# EAGLE board Design_1 (EAGLE 9.6.2)
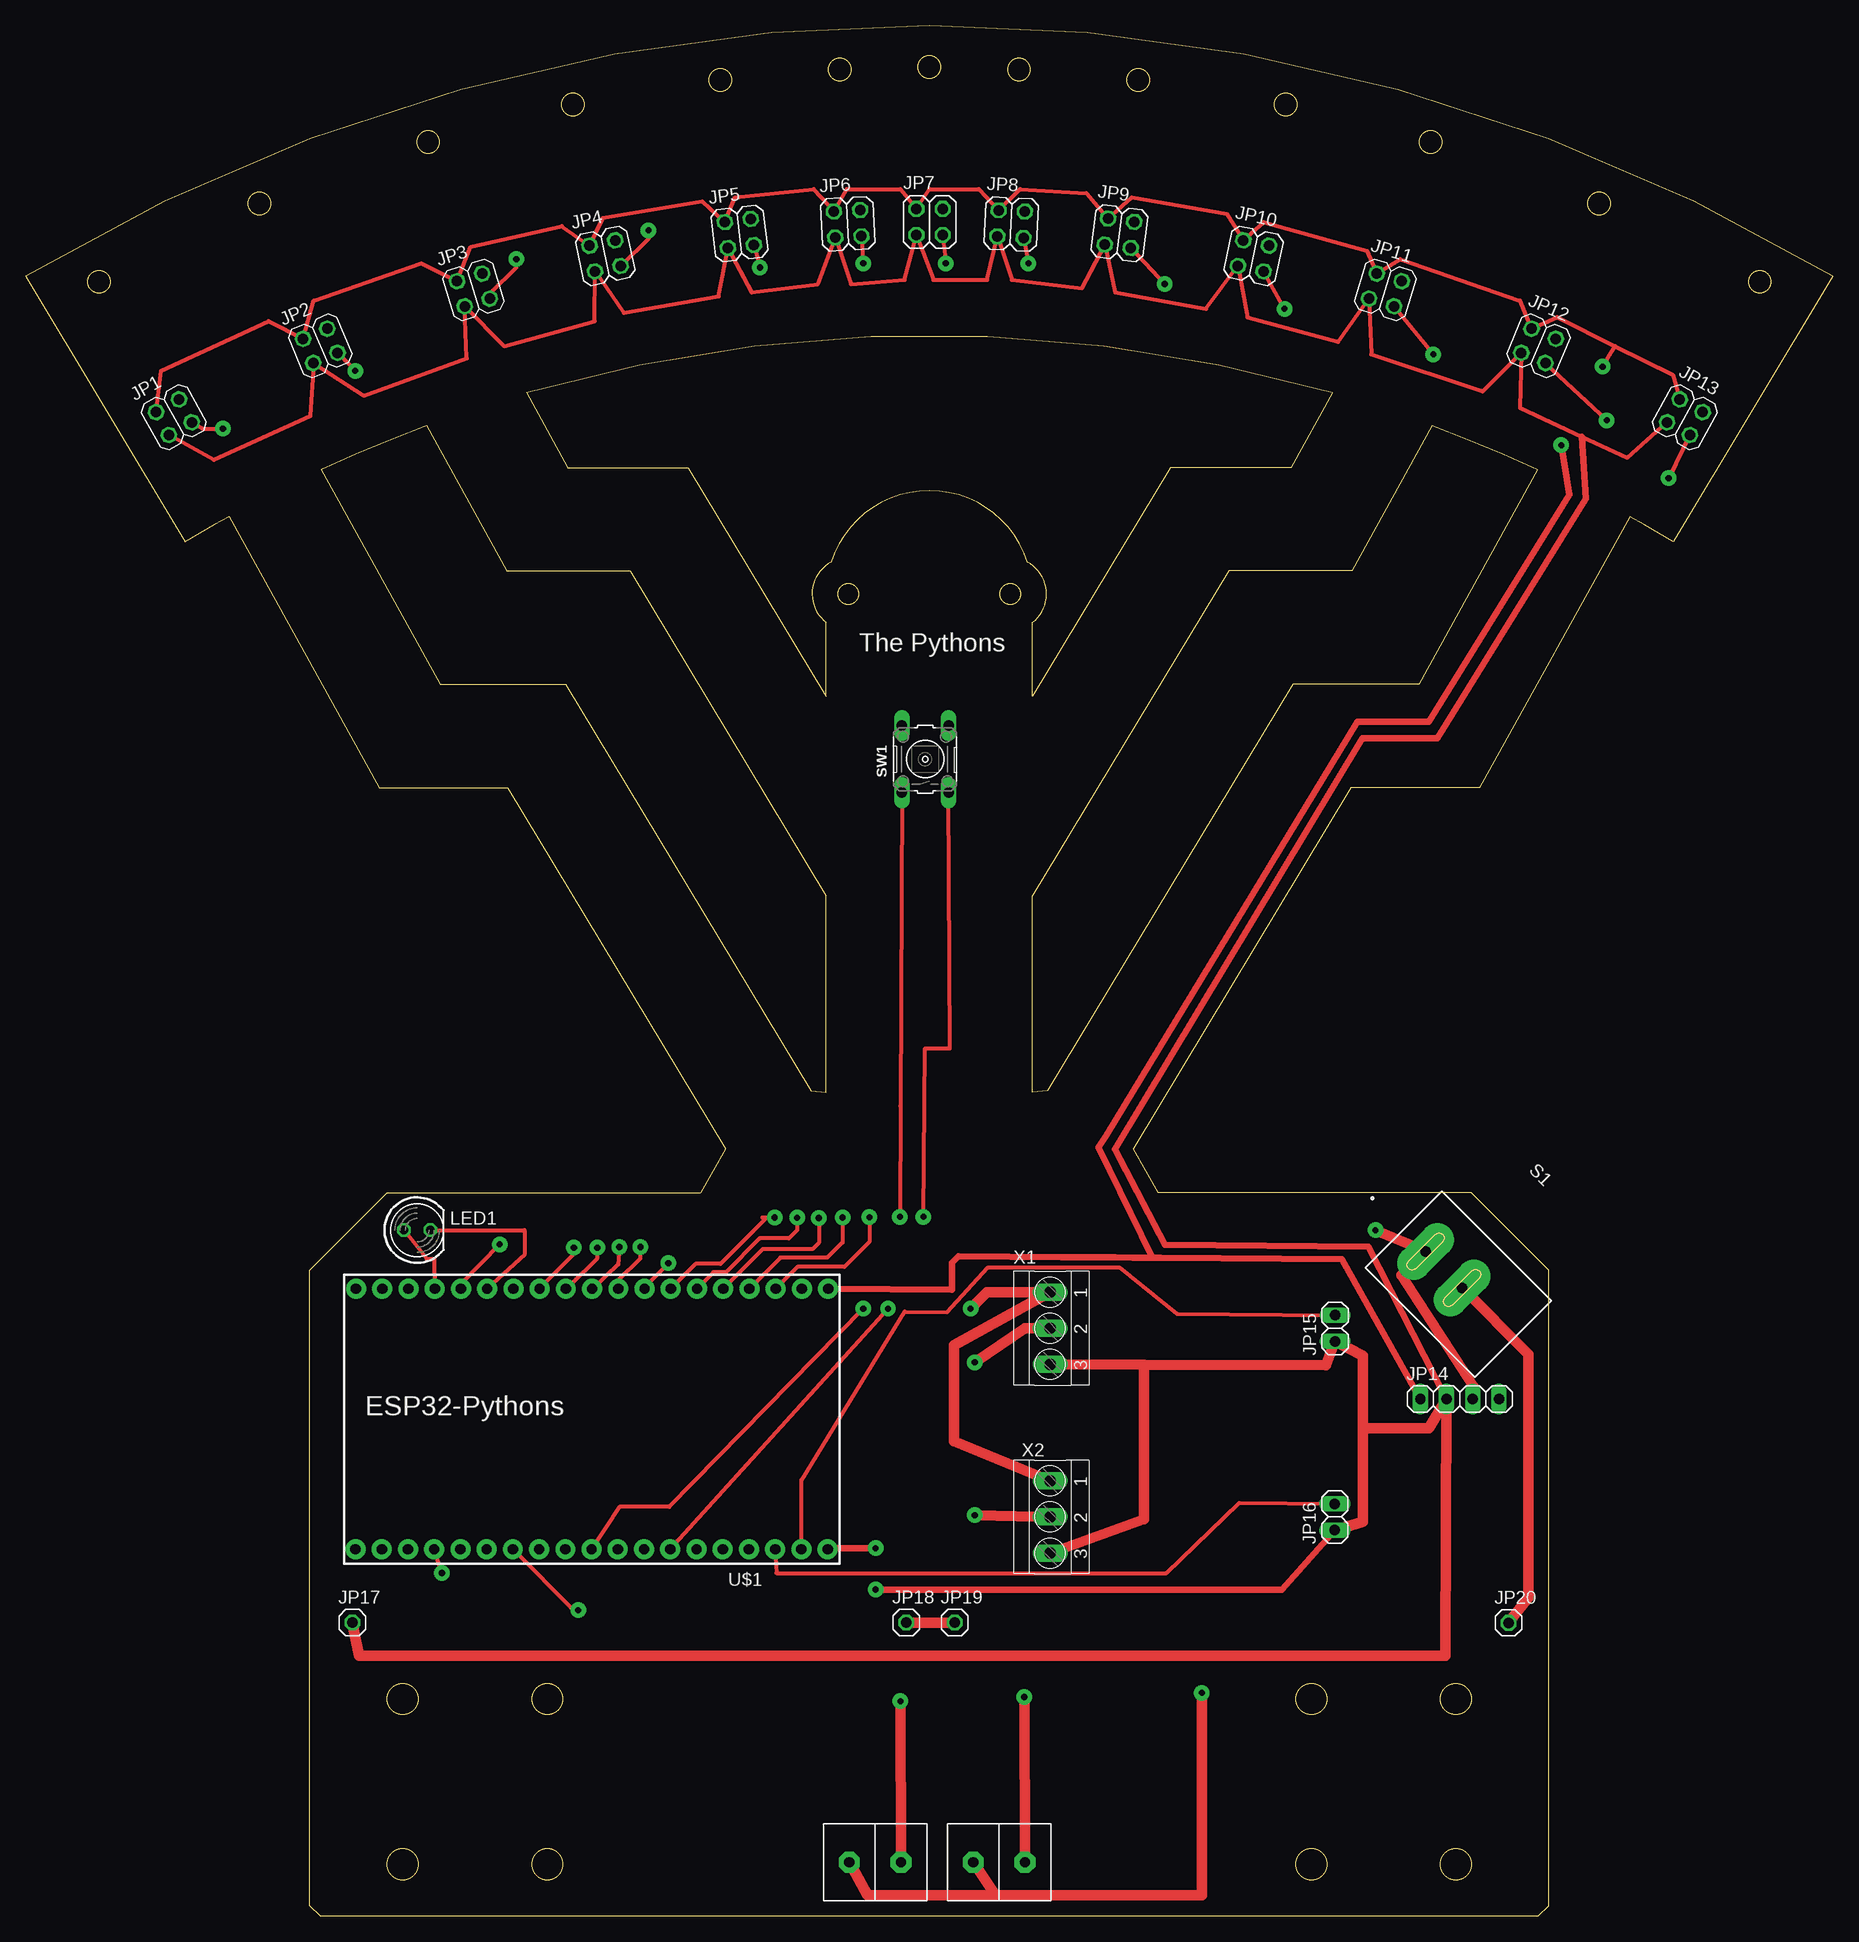
[diagram p0: board, top side]
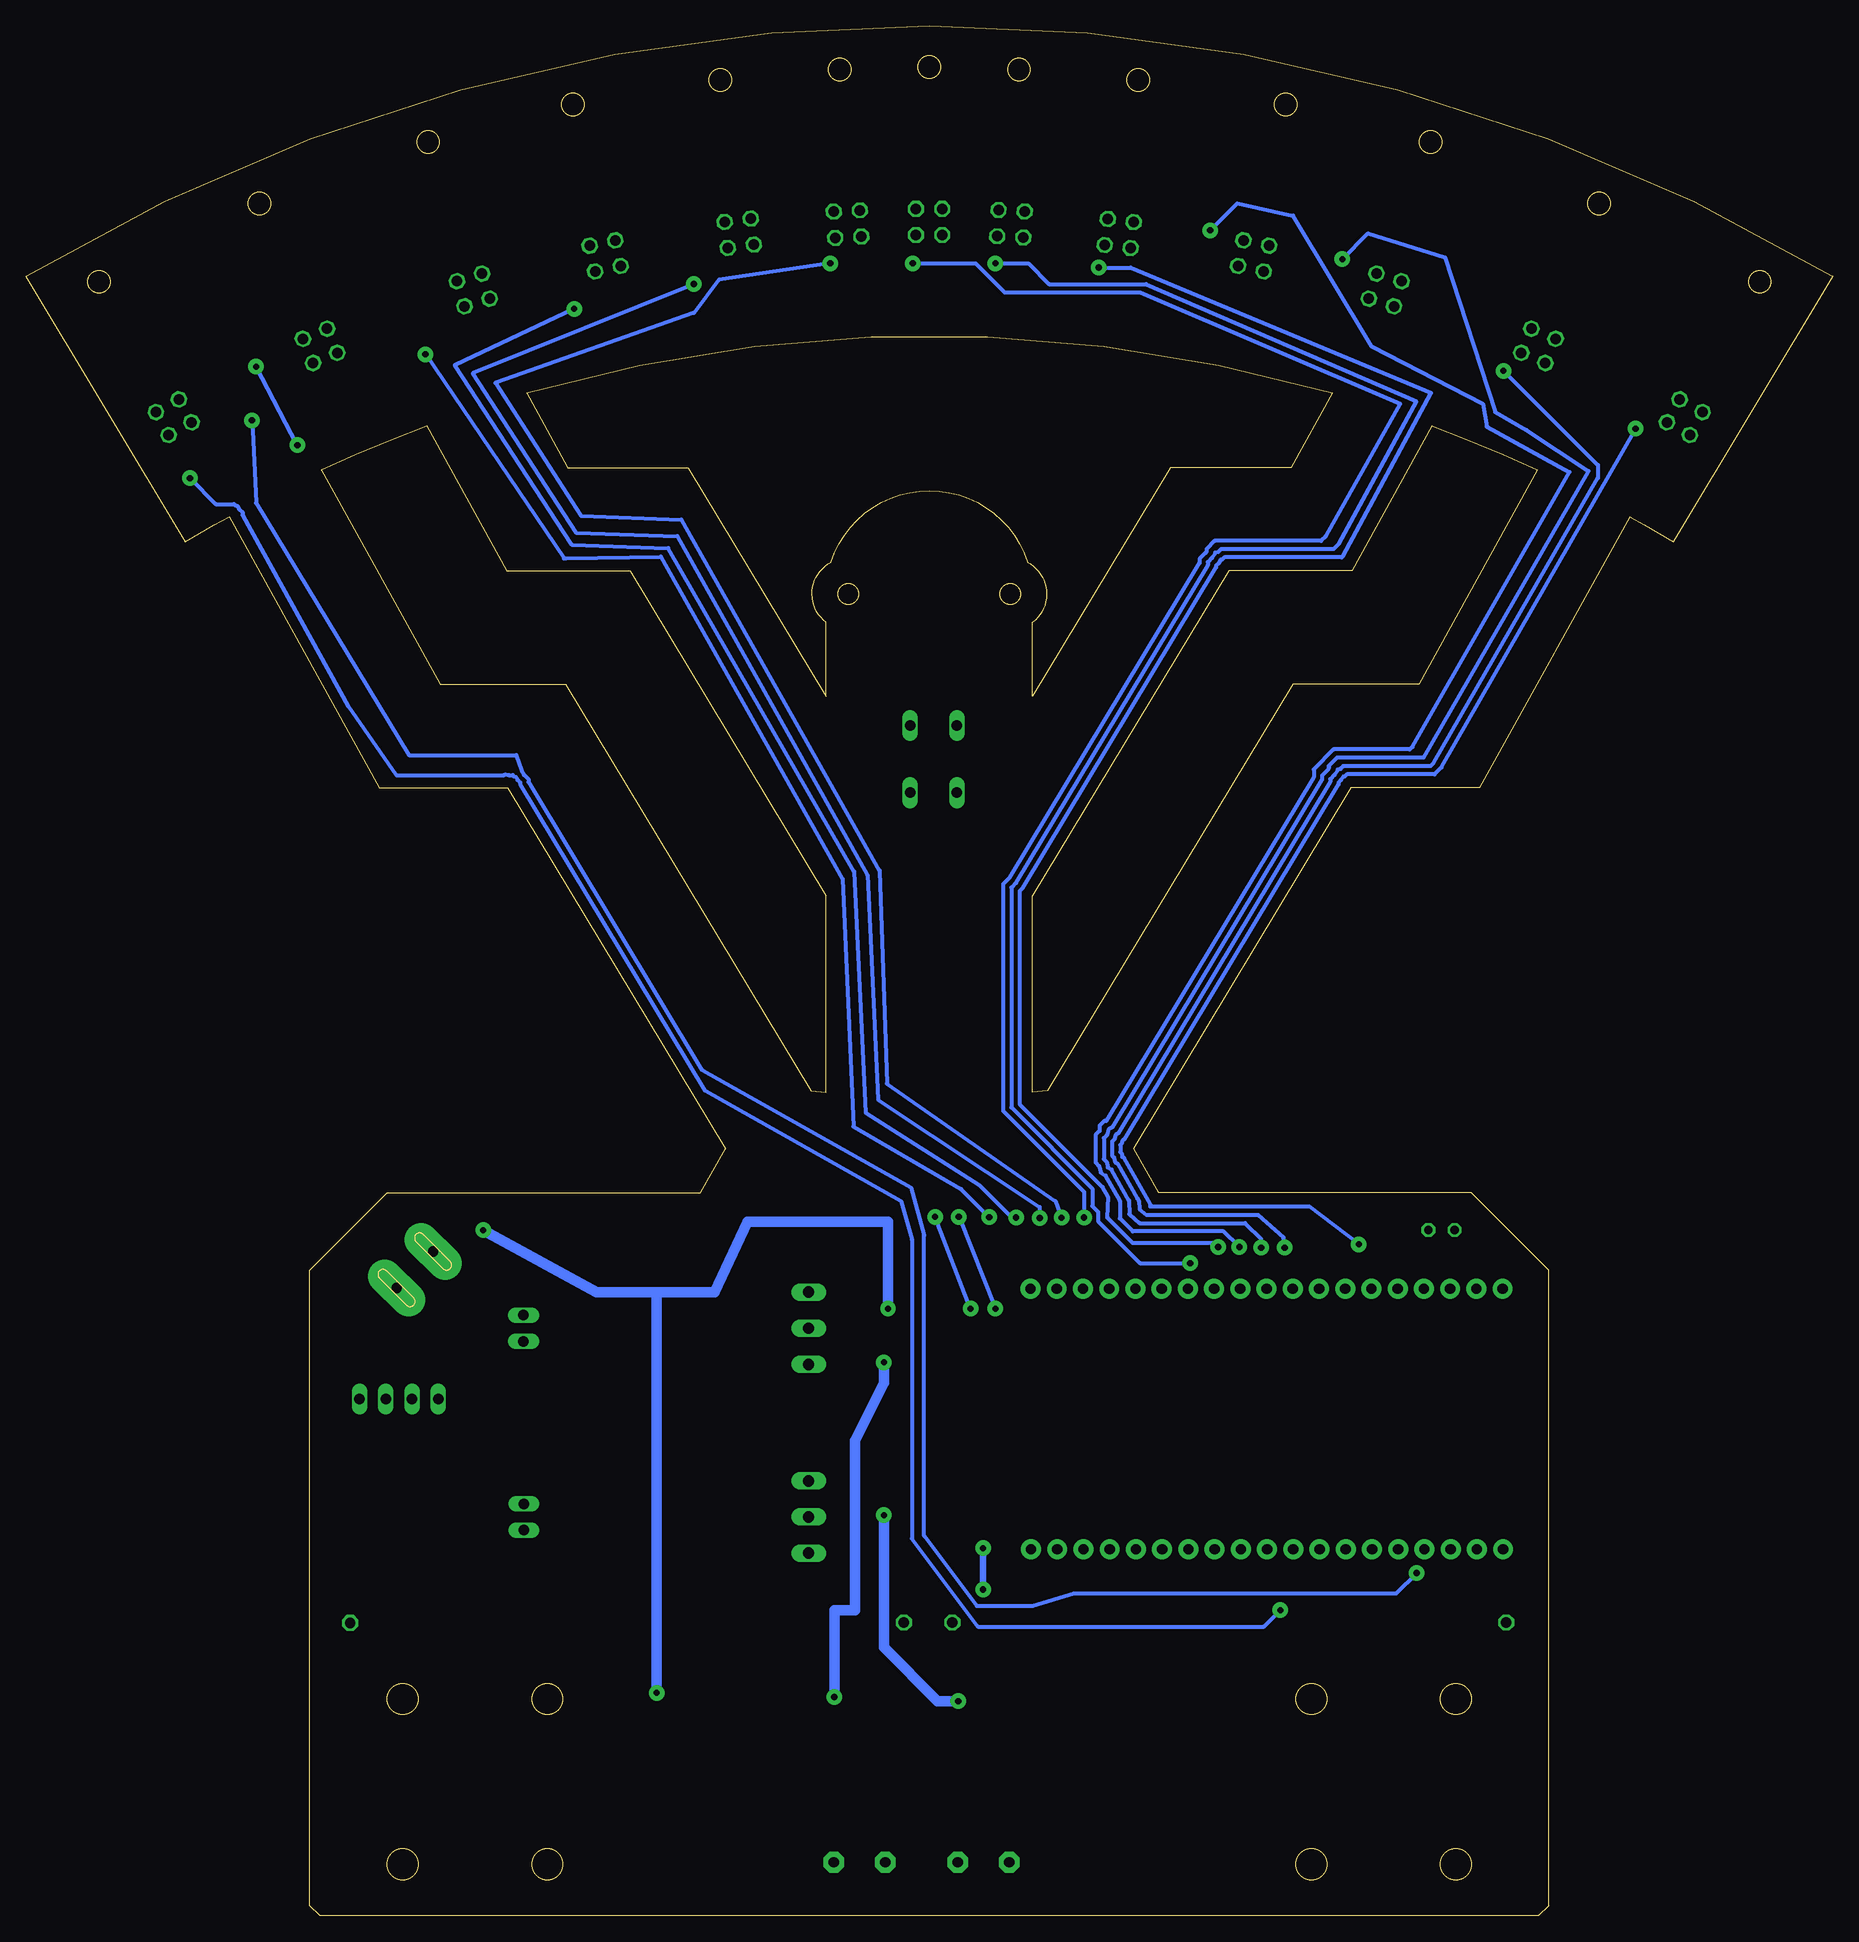
[diagram p1: board, bottom side, seen from below]

Size 175 x 183 mm. Coordinates in mm from the lower left corner, seen from the top.
Outline: 15.44,133.03 0,158.75 arc-62 175,158.75 159.56,133.03 arc2 155.33,135.47
Outline: 15.44,133.03 15.44,133.03
Outline: 15.44,133.03 arc-2 19.67,135.47 34.21,109.23 46.65,109.23 67.75,74.28 65.33,70 35,70 27.5,62.5 27.5,1 28.5,0 146.5,0 147.5,1 147.5,62.5 140,70 109.67,70 107.25,74.28 128.35,109.23 140.79,109.23 155.33,135.47
Outline: 155.33,135.47 155.33,135.47
Outline: 146.41,140 arc5 136.19,144.26 128.42,130.23 116.49,130.23 97.5,98.76 97.5,79.76 98.96,79.89 122.7,119.23 134.9,119.23 146.41,140
Outline: 28.59,140 40.1,119.23 52.3,119.23 76.04,79.89 77.5,79.76 77.5,98.76 58.51,130.23 46.58,130.23 38.81,144.26 arc5 28.59,140
Outline: 97.5,118.11 97.5,125.24 arc114 97.01,131.08 arc144 77.99,131.08 arc114 77.5,125.24 77.5,118.11 64.15,140.23 52.48,140.23 48.48,147.45 arc-32 126.52,147.45 122.52,140.23 110.85,140.23 97.5,118.11
Outline: circle at 79.65,128 radius 1
Outline: circle at 7.08,158.22 radius 1.09
Outline: circle at 22.64,165.8 radius 1.09
Outline: circle at 38.97,171.75 radius 1.09
Outline: circle at 52.99,175.37 radius 1.09
Outline: circle at 67.27,177.76 radius 1.09
Outline: circle at 78.81,178.77 radius 1.09
Outline: circle at 87.5,179 radius 1.09
Outline: circle at 96.19,178.77 radius 1.09
Outline: circle at 107.73,177.76 radius 1.09
Outline: circle at 122.01,175.37 radius 1.09
Outline: circle at 136.03,171.75 radius 1.09
Outline: circle at 152.36,165.8 radius 1.09
Outline: circle at 167.92,158.22 radius 1.09
Outline: circle at 95.35,128 radius 1
Outline: circle at 36.5,21 radius 1.5
Outline: circle at 50.5,5 radius 1.5
Outline: circle at 124.5,21 radius 1.5
Outline: circle at 124.5,5 radius 1.5
Outline: circle at 138.5,5 radius 1.5
Copper layers (1*16): Top 0.035mm / dielectric 1.5mm / Bottom 0.035mm
Design rules "default *": minimum track width 0.4mm, minimum drill 0.35mm, track to track 0.4mm, track to pad 0.4mm, pad to pad 0.4mm, via to via 0.4mm, smd to smd 6mil, copper to edge 40mil, drill to drill 6mil, minimum pad ring 10mil, minimum via ring 8mil, stop-mask expansion 4mil, vias tented up to drill 0mil, thermal gap 10mil

## Footprints (pad centres in the part's own frame; a part is rotated, then mirrored left to right if it is on the bottom)
2X02 = drill 1.016 octagon: 1 -1.27,-1.27; 2 -1.27,1.27; 3 1.27,-1.27; 4 1.27,1.27
1X04 = drill 1.016 long: 1 -3.81,0; 2 -1.27,0; 3 1.27,0; 4 3.81,0
1X02 = drill 1.016 long: 1 -1.27,0; 2 1.27,0
1X01 = drill 1.016 octagon: 1 0,0
LED5MM = drill 0.813 octagon: A -1.27,0; K 1.27,0
E-SWITCH_RR511D1121 = drill 0.98 pad 3.26 long: 1 -5,0; 2 0,0
B3F-10XX = drill 1.016 long: 1 -3.251,2.261; 2 3.251,2.261; 3 -3.251,-2.261; 4 3.251,-2.261
ESP32-DEVKITV1 = drill 1 pad 1.93: 2 11.47,12.962; 3V3 -24.14,-12.27; 4 6.39,12.962; 5 -1.23,12.962; 5V 21.58,-12.27; 12 6.34,-12.27; 13 11.42,-12.27; 14 3.8,-12.27; 15 14.01,12.962; 16 3.85,12.962; 17 1.31,12.962; 18 -3.77,12.962; 19 -6.31,12.962; 21 -11.39,12.962; 22 -19.01,12.962; 23 -21.55,12.962; 25 -3.82,-12.27; 26 -1.28,-12.27; 27 1.26,-12.27; 32 -8.9,-12.27; 33 -6.36,-12.27; 34 -13.98,-12.27; 35 -11.44,-12.27; C 8.93,12.962; CLK 21.63,12.962; D0 19.09,12.962; D1 16.55,12.962; D2 13.96,-12.27; D3 16.5,-12.27; EN -21.6,-12.27; GND1 8.88,-12.27; GND2 19.04,-12.27; GND3 -24.09,12.962; GND4 -8.85,12.962; RX -13.93,12.962; TX\ -16.47,12.962; VN -16.52,-12.27; VP -19.06,-12.27
DBCONN-1X2 = drill 1 pad 2 octagon: P0 -2.54,0; P1 2.46,0
TERMINAL-BLOCK-3-PIN-3.5MM-LONG-PAD = drill 1.1 pad 1.7 long: 1 -3.5,-0.1; 2 0,-0.1; 3 3.5,-0.1

## Placement (x,y rotation side)
JP1  [2X02]  14.34,145.11 29 top
JP2  [2X02]  28.52,152.02 23 top
JP3  [2X02]  43.35,157.43 17 top
JP4  [2X02]  56.1,160.73 12 top
JP5  [2X02]  69.11,162.89 7 top
JP6  [2X02]  79.6,163.83 3 top
JP7  [2X02]  87.52,164.01 0 top
JP8  [2X02]  95.42,163.8 357 top
JP9  [2X02]  105.91,162.92 353 top
JP10  [2X02]  118.89,160.73 348 top
JP11  [2X02]  131.67,157.43 343 top
JP12  [2X02]  146.5,152.02 337 top
JP13  [2X02]  160.67,145.11 331 top
JP14  [1X04]  138.87,50.04 0 top
JP15  [1X02]  126.79,56.9 90 top
JP16  [1X02]  126.77,38.63 90 top
JP17  [1X01]  31.63,28.4 0 top
JP18  [1X01]  85.27,28.41 0 top
JP19  [1X01]  89.96,28.41 0 top
JP20  [1X01]  143.59,28.38 0 top
LED1  [LED5MM]  37.9,66.4 0 top
S1  RR511D1121  [E-SWITCH_RR511D1121]  139.1,60.8 315 top
SW1  [B3F-10XX]  87.1,112 90 top
U$1  ESP32DEVKITV1  [ESP32-DEVKITV1]  53.56,48.46 180 top
U$2  DBCONN-1X2  [DBCONN-1X2]  94.3,5.2 0 top
U$3  DBCONN-1X2  [DBCONN-1X2]  82.3,5.2 0 top
X1  TERMINAL-BLOCK-3.5MM-3-PIN-LONG-PAD  [TERMINAL-BLOCK-3-PIN-3.5MM-LONG-PAD]  99.29,56.9 270 top
X2  TERMINAL-BLOCK-3.5MM-3-PIN-LONG-PAD  [TERMINAL-BLOCK-3-PIN-3.5MM-LONG-PAD]  99.29,38.63 270 top

## Library data of the parts
JP1-JP20 = pinhead
LED1 = led
S1 = RR511D1121; AVAILABILITY: In Stock; CHECK_PRICES: https://www.snapeda.com/parts/RR511D1121/E-Switch/view-part/?ref=eda; DESCRIPTION: Rocker Switch, RR5 Series, SPST,OFF-ON,Blk Rocker,I/O Legend, 20A, 125VAC, | E-Switch RR511D1121; MF: E-Switch; MP: RR511D1121; PACKAGE: None; PRICE: None; PURCHASE-URL: https://www.snapeda.com/api/url_track_click_mouser/?unipart_id=351624&manufacturer=E-Switch&part_name=RR511D1121&search_term=None; SNAPEDA_LINK: https://www.snapeda.com/parts/RR511D1121/E-Switch/view-part/?ref=snap
SW1 = buttons
U$1 = ESP32-DEVKITV1
U$2 U$3 = Terminal Block Connector
X1 X2 = Rembrandt Electronics - Terminal Block 3-5mm v1-0

## Nets
B_+3V3: JP1.2 JP2.2 JP3.2 JP4.2 JP5.2 JP6.2 JP7.2 JP8.2 JP9.2 JP10.2 JP11.2 JP12.2 JP13.2 JP14.1 U$1.3V3
B_GND: JP1.1 JP2.1 JP3.1 JP4.1 JP5.1 JP6.1 JP7.1 JP8.1 JP9.1 JP10.1 JP11.1 JP12.1 JP13.1 JP14.2 JP15.1 JP16.1 JP17.1 U$1.GND3 X1.3 X2.3
BATT+: JP20.1 S1.2
BATT_SERIES: JP18.1 JP19.1
BTN_GND: SW1.3 U$1.GND4
BTN_PIN: SW1.1 U$1.5
LED+: LED1.A U$1.D2
LED-: LED1.K U$1.GND1
MOT1-: U$2.P1 X1.2
MOT2-: U$3.P1 X2.2
PWM1: JP15.2 U$1.23
PWM2: JP16.2 U$1.22
S1: JP1.3 U$1.13
S2: JP2.3 U$1.14
S3: JP3.3 U$1.27
S4: JP4.3 U$1.26
S5: JP5.3 U$1.25
S6: JP6.3 U$1.33
S7: JP7.3 U$1.32
S8: JP8.3 U$1.35
S9: JP9.3 U$1.34
S10: JP10.3 U$1.VN
S11: JP11.3 U$1.VP
S12: JP12.3 U$1.15
S13: JP13.3 U$1.4
SWITCH+: JP14.3 S1.1 U$2.P0 U$3.P0 X1.1 X2.1

## Tracks (layer width: path | path; a pad name or v marks a point on that pad's centre or on a via)
B_+3V3  (via drill 0.6 pad 1.5)
  Top 0.4: JP1.2 13.1,149.6 23.5,154.4 JP2.2 27.9,156.4 38.3,160 JP3.2 43.1,161.6 51.9,163.6 JP4.2 55.9,164.4 65.5,166 JP5.2 68.7,166.4 76.3,167.2 JP6.2 79.5,167.2 84.7,167.2 JP7.2 87.5,167.2 92.3,167.2 JP8.2 96.3,167.2 102.7,166.8 JP9.2 107.1,166.4 116.3,164.8 JP10.2 119.9,164 129.9,161.2 JP11.2 133.1,160.4 144.7,156.4 JP12.2 148.3,154.8 153.9,152 | 153.9,152 159.5,149.2 JP13.2 | 107.28,63.75 107.22,63.75 | v152.7,150 153.9,152
  Top 0.61: U$1.3V3 89.72,60.64 89.72,63.26 90.33,63.87 100.3,63.8 100.7,63.8 102.29,63.78 105.5,63.76 107.22,63.75 | 109.5,63.73 109.9,63.73 127.47,63.6 JP14.1 | 109.5,63.73 109.1,63.73 | 109.5,63.73 109.1,63.73 | 109.1,63.73 107.91,63.74 107.28,63.75 | v148.7,142.4 149.5,137.6 135.9,115.6 128.96,115.6 104.65,75.57 103.9,74.4 109.1,63.73
  Bottom 0.4: v148.7,142.4 v152.7,150
B_GND  (via drill 0.6 pad 1.5)
  Top 0.4: 27.92,150.3 27.58,145.24 18.21,140.98 JP1.1 | 27.92,150.3 32.7,147.2 42.7,150.8 JP3.1 46.3,152 55.1,154.4 JP4.1 57.9,155.2 67.1,156.8 JP5.1 70.3,157.2 76.7,158 JP6.1 79.9,158 85.1,158.4 JP7.1 87.9,158.4 93.1,158.4 JP8.1 95.5,158.4 102.3,157.6 JP9.1 105.5,157.2 114.3,155.6 JP10.1 118.3,154.8 127.1,152.4 JP11.1 130.3,151.2 141.1,147.6 JP12.1 144.7,146 150.71,143.22 155.1,141.2 JP13.1 | U$1.GND3 77.76,35.6 | JP2.1 27.92,150.3
  Top 0.61: v82.3,35.6 77.76,35.6 | v82.3,31.6 121.64,31.6 JP16.1 | JP14.2 130.03,64.77 110.3,65.01 105.49,74.22 129.42,114 136.7,114 151.1,137.2 150.71,143.22
  Top 1.016: 129.48,47.2 129.51,54.22 JP15.1 125.92,53.34 108.3,53.38 | JP16.1 129.5,38.16 129.48,44.36 129.47,44.37 129.48,47.2 | 129.48,47.2 135.9,47.2 JP14.2 137.5,25.2 32.3,25.2 JP17.1 | X1.3 108.3,53.38 | 108.3,53.38 108.3,38.4 X2.3
  Bottom 0.61: v82.3,35.6 v82.3,31.6
BATT+
  Top 1.016: S1.2 145.5,54.4 145.5,30.8 JP20.1
BATT_SERIES
  Top 1.016: JP18.1 JP19.1
BTN_GND  (via drill 0.6 pad 1.5)
  Top 0.4: U$1.GND4 v83.5,58.8 | SW1.3 89.49,84 87.1,84 v86.94,67.69
  Bottom 0.4: v83.5,58.8 v86.94,67.69
BTN_PIN  (via drill 0.6 pad 1.5)
  Top 0.4: SW1.1 84.7,78.4 v84.65,67.69 | v81.1,58.8 62.3,39.6 57.5,39.6 U$1.5
  Bottom 0.4: v84.65,67.69 v81.1,58.8
LED+
  Top 0.4: LED1.A 38.84,63.62 | 38.84,63.62 | 38.84,63.62 39.56,63.63 U$1.D2
LED-
  Top 0.4: LED1.K 48.3,66.4 48.3,64 U$1.GND1
MOT1-  (via drill 0.6 pad 1.5)
  Top 1.016: U$2.P1 v96.7,21.2 | X1.2 96.78,56.9 v91.9,53.6
  Bottom 1.016: v96.7,21.2 96.7,29.6 94.7,29.6 94.7,46 91.9,51.6 v91.9,53.6
MOT2-  (via drill 0.6 pad 1.5)
  Top 1.016: U$3.P1 v84.7,20.8 | v91.9,38.8 97.99,38.63 X2.2
  Bottom 1.016: v84.7,20.8 86.7,20.8 91.9,26 v91.9,38.8
PWM1
  Top 0.4: U$1.23 75.11,42.19 85.1,58.51 89.22,58.47 93.2,62.8 105.9,62.8 111.5,58.29 JP15.2
PWM2
  Top 0.4: U$1.22 72.68,33.2 110.46,33.2 117.52,39.99 JP16.2
S1  (via drill 0.6 pad 1.5)
  Top 0.4: v19.1,144 17.13,144 JP1.3 | v45.9,65.03 42.14,61.2 U$1.13
  Bottom 0.4: v19.1,144 37.9,111.2 38.56,110.54 47.07,110.54 47.28,110.33 47.44,110.29 47.62,109.99 47.87,109.73 47.87,109.57 68.62,75.19 68.79,75.09 68.88,74.77 69.01,74.64 69.01,73.94 68.89,73.83 68.81,73.5 68.65,73.4 66.1,68.88 66.09,68.71 65.83,68.71 50.73,68.71 v45.9,65.03
S2  (via drill 0.6 pad 1.5)
  Top 0.4: v31.9,149.6 31.91,149.61 30.91,150.61 JP2.3 | v53.08,64.7 53.09,64.11 49.76,60.75 U$1.14
  Bottom 0.4: v31.9,149.6 22.75,140.46 22.75,139.23 38.7,111.6 38.96,111.34 47.41,111.34 47.69,111.06 47.95,110.99 48.26,110.48 48.67,110.07 48.67,109.79 69.2,75.78 69.47,75.63 69.59,75.19 69.81,74.97 69.81,73.61 69.61,73.42 69.51,72.98 69.24,72.83 67.35,69.47 67.22,69.24 67.14,68.43 66.46,67.89 55.67,67.89 53.21,65.71 v53.08,64.7
S3  (via drill 0.6 pad 1.5)
  Top 0.4: v47.5,160.4 47.5,159.6 44.94,157.03 JP3.3 | v55.35,64.7 55.32,63.62 52.7,61.08 52.65,61.08 U$1.27
  Bottom 0.4: v47.5,160.4 45,162.9 37.56,160.57 32.7,145.6 29.68,143.86 23.66,139.9 39.64,112.14 48.02,112.14 48.81,111.34 48.81,111.12 48.89,110.98 49.47,110.4 49.47,110.01 69.78,76.37 70.15,76.16 70.31,75.6 70.61,75.3 70.61,73.28 70.34,73.01 70.2,72.47 69.84,72.25 68.15,69.26 68.14,67.94 67.15,67.09 56.93,67.09 55.35,65.52 v55.35,64.7
S4  (via drill 0.6 pad 1.5)
  Top 0.4: v60.3,163.2 60.3,162.4 57.65,159.75 JP4.3 | U$1.26 54.87,60.73 57.38,63.08 v57.48,64.78
  Bottom 0.4: v60.3,163.2 57.68,165.82 52.27,164.62 44.7,152 33.9,146.4 33.51,144.2 25.51,139.78 40.7,113.2 40.96,112.94 48.35,112.94 50.27,111.01 50.27,110.24 70.35,76.97 70.56,76.97 71.01,76.52 71.01,76.06 71.02,76.02 71.41,75.63 71.41,72.95 71.06,72.6 70.9,71.96 70.43,71.67 69.05,69.23 69.05,67.55 67.79,66.29 59,66.29 v57.48,64.78
S5  (via drill 0.6 pad 1.5)
  Top 0.4: JP5.3 v71.1,159.6 | U$1.25 57.38,61.53 59.53,63.67 v59.53,64.77
  Bottom 0.4: v71.1,159.6 67.98,159.6 38.93,147.46 47.5,131.6 47.56,131.54 58.93,131.54 59.13,131.33 59.29,131.29 59.48,130.99 59.73,130.74 59.73,130.57 78.47,99.52 78.76,99.22 78.76,78.61 70.73,70.57 70.21,69.65 70.27,67.6 70.23,67.6 67.81,65.17 59.93,65.17 v59.53,64.77
S6  (via drill 0.6 pad 1.5)
  Top 0.4: JP6.3 v81.1,160 | v62.23,63.2 62.25,63.18 59.92,60.85 U$1.33
  Bottom 0.4: v81.1,160 77.9,160 75.9,158 66.51,158 40.35,146.65 47.9,132.8 48.36,132.34 59.26,132.34 59.54,132.06 59.8,131.99 60.11,131.48 60.53,131.07 60.53,130.79 79.1,100.01 79.56,99.56 79.56,78.27 71.72,70.43 71.72,68.73 71.17,68.18 71.17,67.27 67.1,63.2 v62.23,63.2
S7  (via drill 0.6 pad 1.5)
  Top 0.4: JP7.3 v89.1,160 | v72.52,67.62 71.32,67.62 71.55,67.42 67.26,63.13 64.86,63.13 U$1.32
  Bottom 0.4: v89.1,160 83.01,160 80.21,157.2 67.1,157.2 41.9,146.4 49.1,133.6 49.56,133.14 59.87,133.14 60.66,132.34 60.66,132.12 60.74,131.98 61.33,131.4 61.33,131.01 79.74,100.51 80.36,99.89 80.36,77.94 72.52,70.1 v72.52,67.62
S8  (via drill 0.6 pad 1.5)
  Top 0.4: JP8.3 v97.1,160 | v74.7,67.6 74.7,66.4 73.9,65.6 71.07,65.6 67.8,62.33 66.6,62.33 U$1.35
  Bottom 0.4: v97.1,160 107.9,158.4 110.3,155.2 129.51,148.42 121.21,135.55 111.5,135.2 92.3,101.2 91.61,80.59 75.29,69.2 v74.7,67.6
S9  (via drill 0.6 pad 1.5)
  Top 0.4: JP9.3 v110.3,158 | v76.8,67.57 76.8,65.17 76.19,64.55 71.36,64.55 U$1.34
  Bottom 0.4: v110.3,158 131.72,149.36 121.72,133.94 111.9,133.6 93.5,100.8 92.46,79.04 76.8,68.63 v76.8,67.57
S10  (via drill 0.6 pad 1.5)
  Top 0.4: JP10.3 v121.9,155.6 | v79.1,67.61 79.1,65.21 77.61,63.73 73.08,63.73 U$1.VN
  Bottom 0.4: v121.9,155.6 133.46,150.16 122.14,132.77 112.78,132.43 94.77,101.12 93.66,77.78 82.62,70.74 79.5,67.61 v79.1,67.61
S11  (via drill 0.6 pad 1.5)
  Top 0.4: JP11.3 v136.3,151.2 | v81.7,67.66 81.7,65.26 79.28,62.83 74.73,62.83 U$1.VP
  Bottom 0.4: v136.3,151.2 122.87,131.45 122.7,131.45 113.5,131.6 95.9,100.4 94.86,76.43 84.41,70.37 v81.7,67.66
S12  (via drill 0.6 pad 1.5)
  Top 0.4: JP12.3 v153.1,144.8 | v40.3,33.2 U$1.15
  Bottom 0.4: v153.1,144.8 152.7,136.8 137.9,112.4 127.5,112.4 126.98,110.87 126.74,110.48 126.33,110.07 126.33,109.79 109.49,81.89 89.27,70.48 87.99,65.89 87.99,36.8 82.9,30 77.5,30 73.5,31.2 42.3,31.2 v40.3,33.2
S13  (via drill 0.6 pad 1.5)
  Top 0.4: JP13.3 v159.1,139.2 | v53.5,29.6 53.07,29.6 U$1.4
  Bottom 0.4: v159.1,139.2 156.59,136.69 154.82,136.69 154.69,136.56 154.5,136.51 154.34,136.22 154.01,135.89 154.01,135.62 143.76,117.12 139.13,110.45 128.69,110.45 128.55,110.54 128.2,110.45 127.84,110.45 127.72,110.33 127.56,110.29 127.38,109.99 127.13,109.73 127.13,109.57 109.22,79.9 90.22,69.18 89.19,65.48 89.19,36.53 82.8,28 55.1,28 v53.5,29.6
SWITCH+  (via drill 0.6 pad 1.5)
  Top 1.016: JP14.3 140.18,51.31 133.23,62.05 S1.1 v130.7,66.4 | X2.1 89.9,45.95 89.9,55.25 X1.1 93.1,60.4 v91.5,58.8 | v130.7,66.4 | U$3.P0 81.5,2 93.9,2 | 93.9,2 113.9,2 v113.9,21.6 | U$2.P0 93.9,2
  Bottom 1.016: 113.9,60.4 108.3,60.4 105.1,67.2 91.5,67.2 v91.5,58.8 | 113.9,60.4 119.7,60.4 v130.7,66.4 | v113.9,21.6 113.9,60.4

## Text on the board
tNames: The Pythons